# EAGLE board bread-supply_v0 (EAGLE 5.07)

Size 56.31 x 49.77 mm. Coordinates in mm from the lower left corner, seen from the top.
Outline: 0,0 56.31,0.13 56.19,49.77 0,49.77 0,0
Copper layers (1*16): Top 0.035mm / dielectric 1.5mm / Bottom 0.035mm
Design rules "SparkFun": minimum track width 8mil, minimum drill 20mil, track to track 8mil, track to pad 8mil, pad to pad 8mil, via to via 8mil, smd to smd 8mil, copper to edge 10mil, drill to drill 8mil, minimum pad ring 12mil, minimum via ring 10mil, stop-mask expansion 4mil, vias tented up to drill 25mil, thermal gap 10mil

## Footprints (pad centres in the part's own frame; a part is rotated, then mirrored left to right if it is on the bottom)
22-23-2031 = drill 1 long: 1 -2.54,0; 2 0,0; 3 2.54,0
1X01 = drill 1.016 octagon: 1 0,0
CPOL-RADIAL-100UF-25V = drill 0.7 pad 1.651 square: 1 1.27,0 | drill 0.7 pad 1.651 round: 2 -1.27,0
CPOL-RADIAL-10UF-25V = drill 0.7 pad 1.651 square: 1 1.27,0 | drill 0.7 pad 1.651 round: 2 -1.27,0
CAP-PTH-SMALL = drill 0.7 pad 1.651 round: 1 0,0; 2 2.54,0
DO35-7 = drill 0.813 long: A 3.81,0; C -3.81,0
1X02 = drill 1.016 long: 1 -1.27,0; 2 1.27,0
78XXL = drill 1.016 long: GND 0,-3.81; IN -2.54,-3.81; OUT 2.54,-3.81 | hole 3.302: 0,11.176
DIL-08 = drill 0.813 long: 1 -3.81,-3.81; 2 -1.27,-3.81; 3 1.27,-3.81; 4 3.81,-3.81; 5 3.81,3.81; 6 1.27,3.81; 7 -1.27,3.81; 8 -3.81,3.81
POWER_JACK_2.1X5.5MM_BIG = drill 0.9 pad 2.184 round: $1GND -0.048,6.625; $1GND1 -0.703,6.63; $1GND2 -1.463,6.635; $1GND3 0.562,6.62; $1GND4 1.297,6.625; $1GNDBREAK 5.445,11.109; $1GNDBREAK1 5.445,11.754; $1GNDBREAK2 5.43,12.409; $1GNDBREAK3 5.465,10.484; $1GNDBREAK4 5.465,9.809; $2PWR -0.12,14.369; $2PWR1 -0.755,14.369; $2PWR2 -1.405,14.369; $2PWR5 0.515,14.369; $2PWR7 1.15,14.369 | drill 0.9 round: $2PWR3 0.515,14.369; $2PWR4 0.515,14.369 | drill 0.9 pad 1.676 round: $2PWR6 0.505,14.349
LED3MM = drill 0.813 pad 1.88 round: A -1.27,0; K 1.27,0
AXIAL-0.3 = drill 0.9 pad 1.88 round: P$1 -3.81,0; P$2 3.81,0
6410-03 = drill 1.016 long: 1 2.54,0; 2 0,0; 3 -2.54,0

## Placement (x,y rotation side)
2510-SUPPLY  2510 PIN  [22-23-2031]  31.62,4.57 270 top
-VCC_OUT  -VCC  [1X01]  49.66,27.94 0 top
C1  100uf  [CPOL-RADIAL-100UF-25V]  8,22.86 180 top
C2  10uf  [CPOL-RADIAL-10UF-25V]  20.57,44.45 270 top
C3  100uf  [CPOL-RADIAL-100UF-25V]  41.27,23.37 270 top
C4  100uf  [CPOL-RADIAL-100UF-25V]  42.04,12.06 90 top
C5  0.01  [CAP-PTH-SMALL]  17.02,23.62 90 top
C6  0.01  [CAP-PTH-SMALL]  17.14,17.02 90 top
D1  1N4148DO35-7  [DO35-7]  42.93,32.26 0 top
D2  1N4148DO35-7  [DO35-7]  35.56,32.26 270 top
HEAD_PIN  BREAD  [1X02]  50.67,12.83 270 top
HEEAD_PIN  BREAD  [1X02]  50.55,40.64 270 top
IC1  7805  [78XXL]  9.27,33.91 0 top
IC3  NE555  [DIL-08]  30.35,16.51 90 top
J1  POWER_JACKPTH_SLOT  [POWER_JACK_2.1X5.5MM_BIG]  -1.65,11.05 270 top
LED1  RED  [LED3MM]  28.07,34.92 270 top
R1  680  [AXIAL-0.3]  24.26,39.12 180 top
R2  1k  [AXIAL-0.3]  21.46,11.43 270 top
R3  75k  [AXIAL-0.3]  21.46,21.72 270 top
XH-5V  XH-CON  [6410-03]  32.13,45.72 270 top

## Library data of the parts
2510-SUPPLY XH-5V = con-molex
-VCC_OUT HEAD_PIN HEEAD_PIN = pinhead
C1-C6 IC1 LED1 R1-R3 = SparkFun
D1 D2 = diode
IC3 = st-microelectronics
J1 = digital-toy

## Nets
5V: C2.1 HEAD_PIN.1 HEEAD_PIN.1 IC1.OUT R1.P$2 XH-5V.1
GND: 2510-SUPPLY.2 C1.2 C2.2 C4.1 C5.2 C6.2 D2.C HEAD_PIN.2 HEEAD_PIN.2 IC1.GND IC3.1 J1.$1GND J1.$1GNDBREAK LED1.K XH-5V.2
N$2: IC3.7 R2.P$1 R3.P$2
N$3: C5.1 IC3.2 IC3.6 R3.P$1
N$5: C6.1 IC3.5
N$6: C3.1 IC3.3
N$7: C3.2 D1.C D2.A
N$8: 2510-SUPPLY.3 -VCC_OUT.1 C4.2 D1.A
N$10: LED1.A R1.P$1
VCC: 2510-SUPPLY.1 C1.1 IC1.IN IC3.4 IC3.8 J1.$2PWR R2.P$2

## Tracks (layer width: path | path; a pad name or v marks a point on that pad's centre or on a via)
5V  (5 unrouted)
GND  (14 unrouted)
N$2  (2 unrouted)
N$3  (3 unrouted)
N$5  (1 unrouted)
N$6  (1 unrouted)
N$7  (2 unrouted)
N$8  (3 unrouted)
N$10  (1 unrouted)
VCC  (6 unrouted)